# EAGLE board sensor (EAGLE 9.6.1)
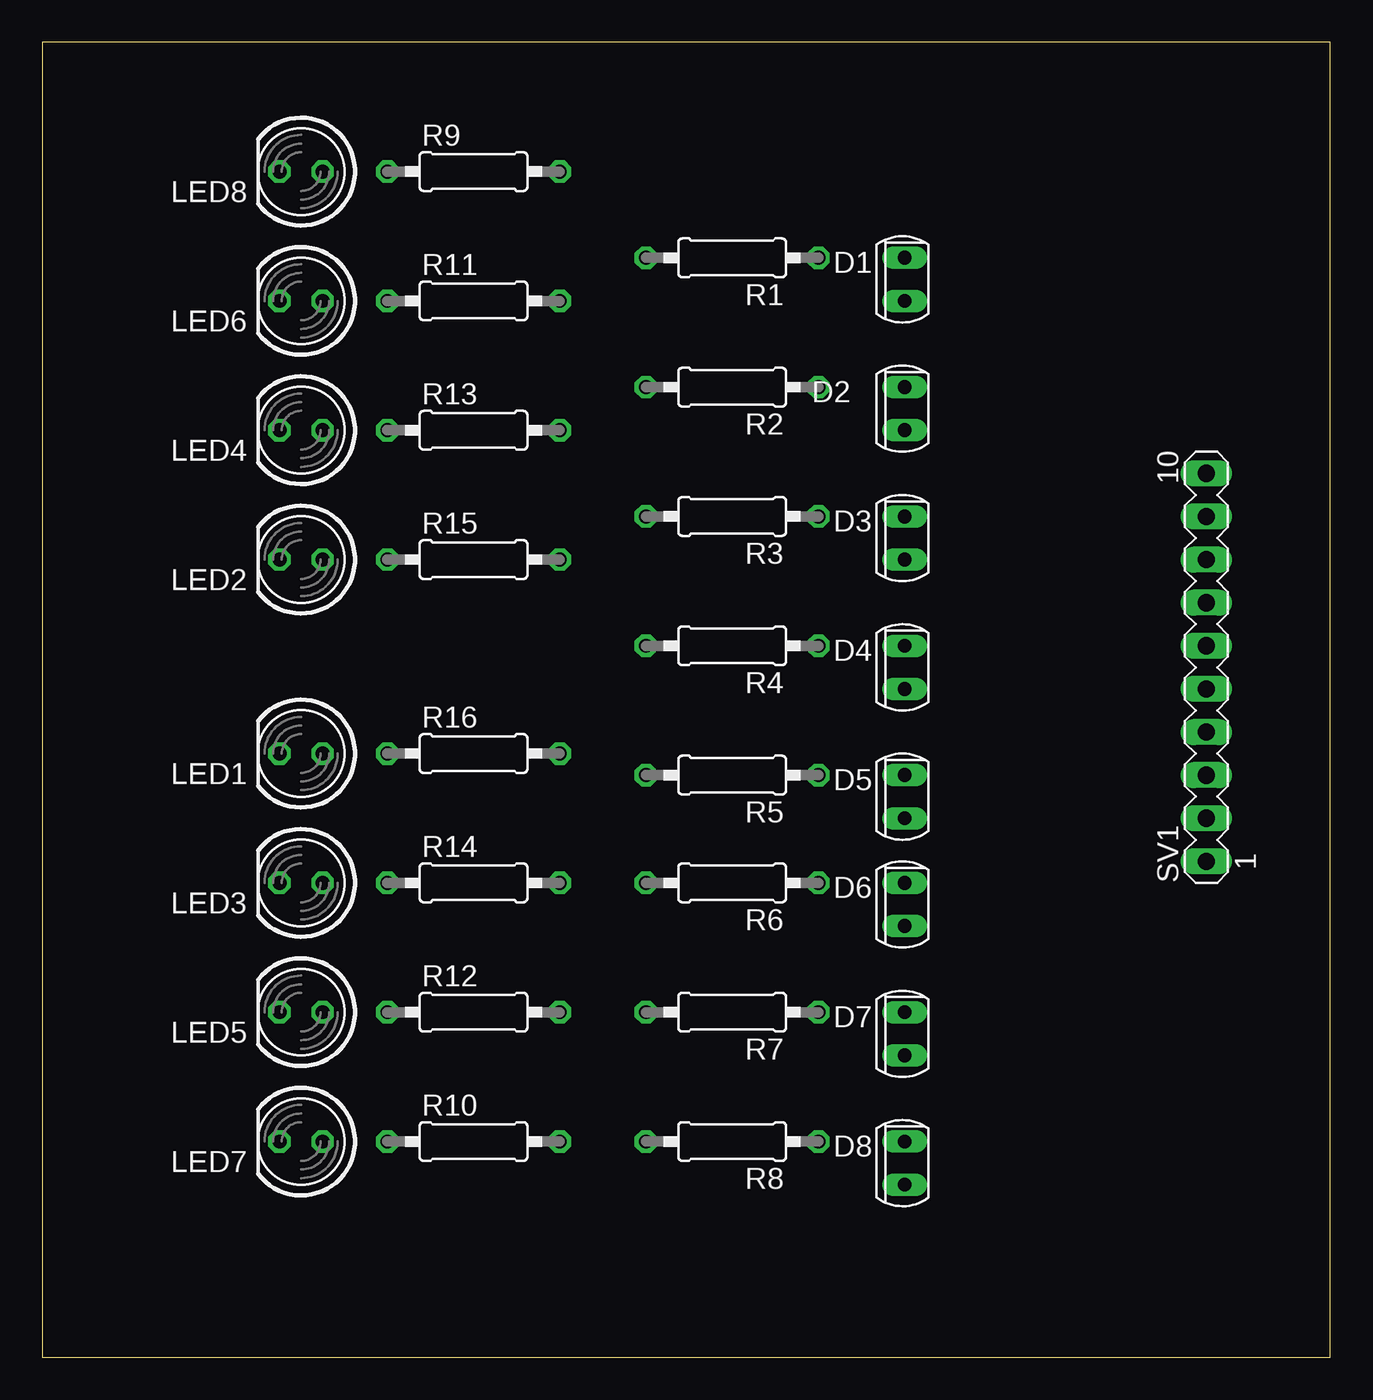
[diagram p0: board, top side]
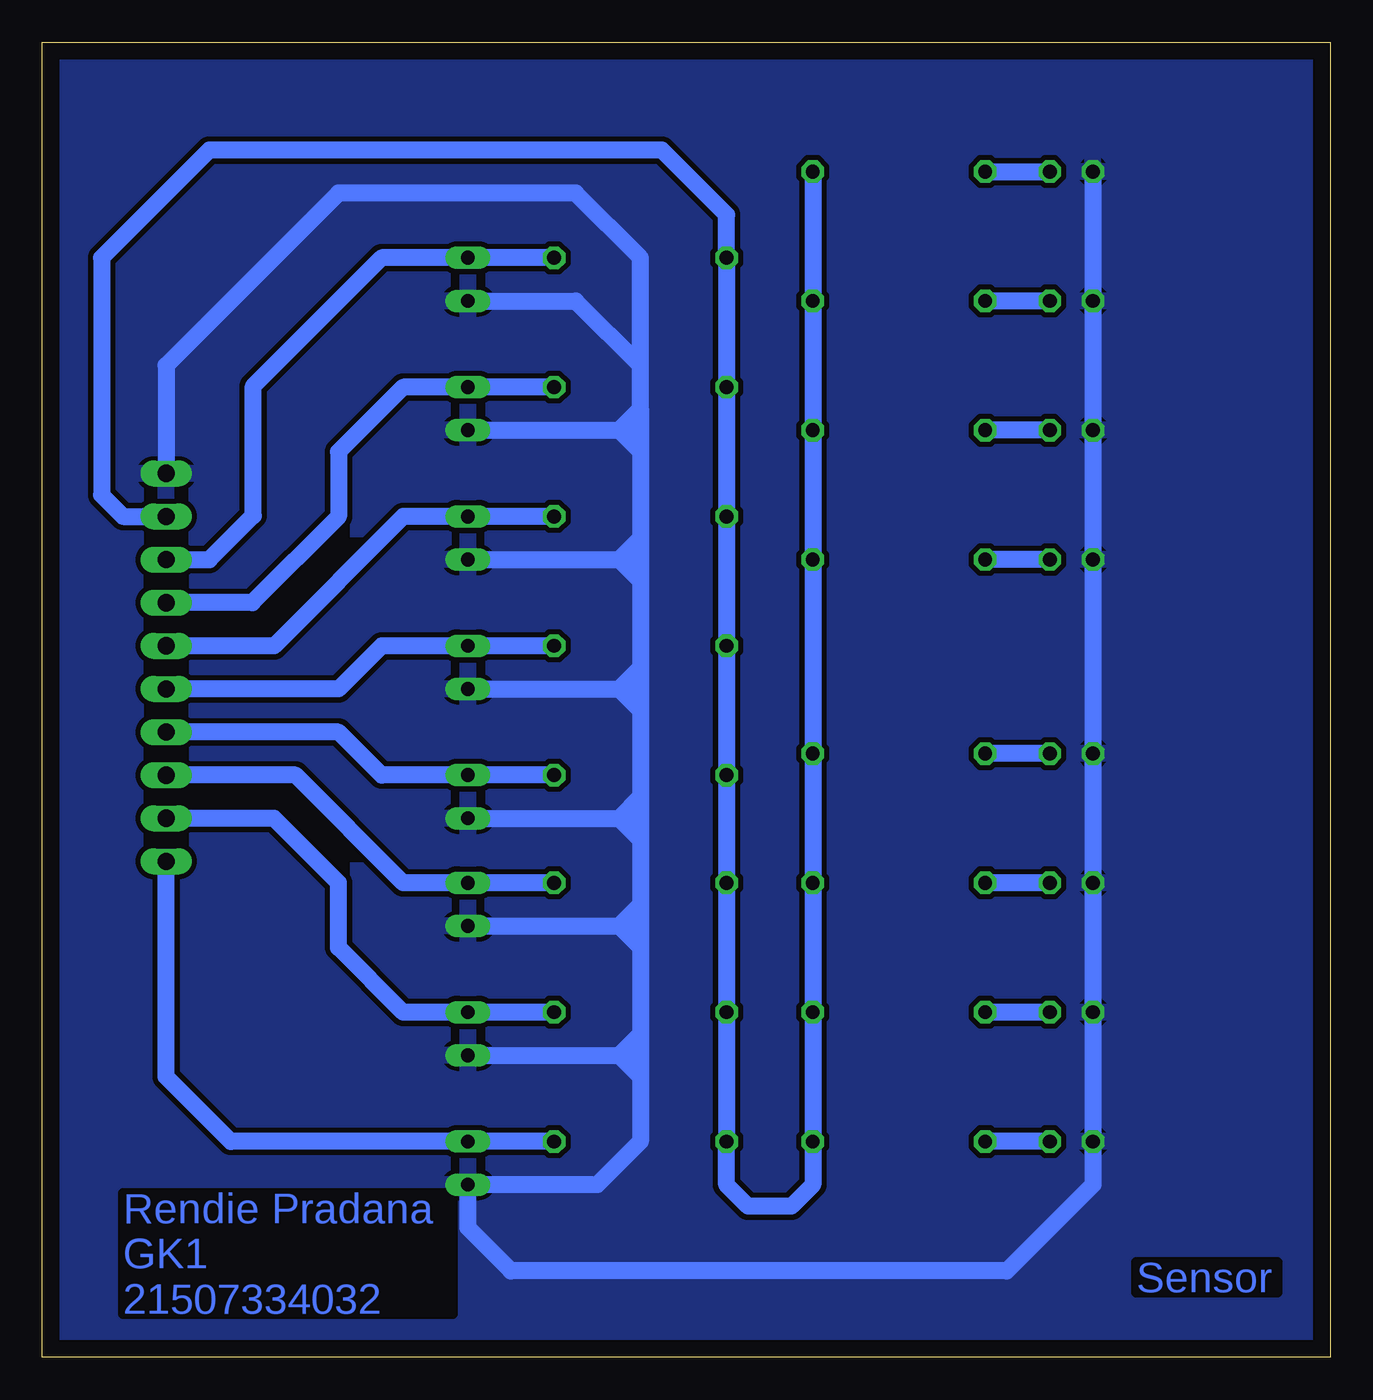
[diagram p1: board, bottom side, seen from below]

Size 75.87 x 77.46 mm. Coordinates in mm from the lower left corner, seen from the top.
Outline: 0,0 75.87,0 75.87,77.46 0,77.46 0,0
Copper layers (1*16): Top 0.035mm / dielectric 1.5mm / Bottom 0.035mm
Design rules "default *": minimum track width 6mil, minimum drill 0.35mm, track to track 12mil, track to pad 12mil, pad to pad 12mil, via to via 12mil, smd to smd 12mil, copper to edge 40mil, drill to drill 6mil, minimum pad ring 10mil, minimum via ring 8mil, stop-mask expansion 4mil, vias tented up to drill 0mil, thermal gap 10mil

## Footprints (pad centres in the part's own frame; a part is rotated, then mirrored left to right if it is on the bottom)
SFH225 = drill 0.813 long: A 0,1.27; K 0,-1.27
LED5MM = drill 0.813 octagon: A -1.27,0; K 1.27,0
0207/10 = drill 0.813 octagon: 1 -5.08,0; 2 5.08,0
MA10-1 = drill 1.016 long: 1 -11.43,0; 2 -8.89,0; 3 -6.35,0; 4 -3.81,0; 5 -1.27,0; 6 1.27,0; 7 3.81,0; 8 6.35,0; 9 8.89,0; 10 11.43,0

## Placement (x,y rotation side)
D1  PhotoDioda  [SFH225]  50.8,63.5 180 top
D2  PhotoDioda  [SFH225]  50.8,55.88 180 top
D3  PhotoDioda  [SFH225]  50.8,48.26 180 top
D4  PhotoDioda  [SFH225]  50.8,40.64 180 top
D5  PhotoDioda  [SFH225]  50.8,33.02 180 top
D6  PhotoDioda  [SFH225]  50.8,26.67 180 top
D7  PhotoDioda  [SFH225]  50.8,19.05 180 top
D8  PhotoDioda  [SFH225]  50.8,11.43 180 top
LED1  LED putih SB  [LED5MM]  15.24,35.56 180 top
LED2  LED putih SB  [LED5MM]  15.24,46.99 180 top
LED3  LED putih SB  [LED5MM]  15.24,27.94 180 top
LED4  LED putih SB  [LED5MM]  15.24,54.61 180 top
LED5  LED putih SB  [LED5MM]  15.24,20.32 180 top
LED6  LED putih SB  [LED5MM]  15.24,62.23 180 top
LED7  LED putih SB  [LED5MM]  15.24,12.7 180 top
LED8  LED putih SB  [LED5MM]  15.24,69.85 180 top
R1  [0207/10]  40.64,64.77 180 top
R2  [0207/10]  40.64,57.15 180 top
R3  [0207/10]  40.64,49.53 180 top
R4  [0207/10]  40.64,41.91 180 top
R5  [0207/10]  40.64,34.29 180 top
R6  [0207/10]  40.64,27.94 180 top
R7  [0207/10]  40.64,20.32 180 top
R8  [0207/10]  40.64,12.7 180 top
R9  330  [0207/10]  25.4,69.85 0 top
R10  330  [0207/10]  25.4,12.7 0 top
R11  330  [0207/10]  25.4,62.23 0 top
R12  330  [0207/10]  25.4,20.32 0 top
R13  330  [0207/10]  25.4,54.61 0 top
R14  330  [0207/10]  25.4,27.94 0 top
R15  330  [0207/10]  25.4,46.99 0 top
R16  330  [0207/10]  25.4,35.56 0 top
SV1  [MA10-1]  68.58,40.64 90 top

## Library data of the parts
D1-D8 = opto-trans-siemens
LED1-LED8 = led
R1-R16 = resistor
SV1 = con-lstb

## Nets
GND: D1.A D2.A D3.A D4.A D5.A D6.A D7.A D8.A LED1.K LED2.K LED3.K LED4.K LED5.K LED6.K LED7.K LED8.K SV1.10
N$1: LED7.A R10.1
N$2: D7.K R7.1 SV1.2
N$3: D8.K R8.1 SV1.1
N$4: D1.K R1.1 SV1.8
N$5: D2.K R2.1 SV1.7
N$6: D3.K R3.1 SV1.6
N$7: D5.K R5.1 SV1.4
N$8: D4.K R4.1 SV1.5
N$9: D6.K R6.1 SV1.3
N$10: LED6.A R11.1
N$11: LED5.A R12.1
N$12: LED4.A R13.1
N$13: LED3.A R14.1
N$14: LED2.A R15.1
N$15: LED1.A R16.1
N$16: LED8.A R9.1
VCC: R1.2 R2.2 R3.2 R4.2 R5.2 R6.2 R7.2 R8.2 R9.2 R10.2 R11.2 R12.2 R13.2 R14.2 R15.2 R16.2 SV1.9

## Tracks (layer width: path | path; a pad name or v marks a point on that pad's centre or on a via)
GND
  Bottom 1.016: D1.A 44.45,62.23 40.64,58.42 | 40.64,55.88 40.64,58.42 | 40.64,55.88 40.64,54.61 | 40.64,54.61 40.64,53.34 | 40.64,53.34 40.64,48.26 | 40.64,48.26 40.64,46.99 | 40.64,46.99 40.64,45.72 | 40.64,45.72 40.64,40.64 | 40.64,40.64 40.64,39.37 | 40.64,39.37 40.64,38.1 | 40.64,38.1 40.64,33.02 | 40.64,33.02 40.64,31.75 | 40.64,31.75 40.64,30.48 | 40.64,30.48 40.64,26.67 | 40.64,26.67 40.64,25.4 | 40.64,25.4 40.64,24.13 | 40.64,24.13 40.64,19.05 | 40.64,19.05 40.64,17.78 | 40.64,17.78 40.64,16.51 | 40.64,16.51 40.64,12.7 43.18,10.16 D8.A 50.8,7.62 48.26,5.08 19.05,5.08 13.97,10.16 LED7.K LED5.K LED3.K LED1.K LED2.K LED4.K LED6.K LED8.K | D7.A 41.91,17.78 | 40.64,17.78 41.91,17.78 | D6.A 41.91,25.4 | 41.91,25.4 40.64,25.4 | D4.A 41.91,39.37 | 40.64,39.37 41.91,39.37 | D3.A 41.91,46.99 | 40.64,46.99 41.91,46.99 | D2.A 41.91,54.61 | 40.64,54.61 41.91,54.61 | 41.91,17.78 40.64,19.05 | 41.91,17.78 40.64,16.51 | 41.91,25.4 40.64,24.13 | 41.91,25.4 40.64,26.67 | D5.A 41.91,31.75 | 40.64,31.75 41.91,31.75 | 41.91,31.75 40.64,30.48 | 41.91,31.75 40.64,33.02 | 41.91,39.37 40.64,38.1 | 41.91,39.37 40.64,40.64 | 41.91,46.99 40.64,45.72 | 41.91,46.99 40.64,48.26 | 41.91,54.61 40.64,53.34 | 41.91,54.61 40.64,55.88 | 40.64,58.42 40.64,64.77 44.45,68.58 58.42,68.58 68.58,58.42 SV1.10
  pour Bottom: 0,77.47 0,0 76.2,0 76.2,77.47
N$1
  Bottom 1.016: LED7.A R10.1
N$2
  Bottom 1.016: R7.1 D7.K 54.61,20.32 58.42,24.13 58.42,27.94 62.23,31.75 SV1.2
N$3
  Bottom 1.016: R8.1 D8.K 64.77,12.7 68.58,16.51 SV1.1
N$4
  Bottom 1.016: R1.1 D1.K 55.88,64.77 63.45,57.2 63.45,49.58 66.04,46.99 SV1.8
N$5
  Bottom 1.016: R2.1 D2.K 54.61,57.15 58.42,53.34 58.42,49.53 63.5,44.45 SV1.7
N$6
  Bottom 1.016: R3.1 D3.K 54.61,49.53 62.23,41.91 SV1.6
N$7
  Bottom 1.016: R5.1 D5.K 55.88,34.29 58.42,36.83 SV1.4
N$8
  Bottom 1.016: SV1.5 58.42,39.37 55.88,41.91 D4.K R4.1
N$9
  Bottom 1.016: R6.1 D6.K 54.61,27.94 60.96,34.29 SV1.3
N$10
  Bottom 1.016: LED6.A R11.1
N$11
  Bottom 1.016: LED5.A R12.1
N$12
  Bottom 1.016: LED4.A R13.1
N$13
  Bottom 1.016: LED3.A R14.1
N$14
  Bottom 1.016: LED2.A R15.1
N$15
  Bottom 1.016: LED1.A R16.1
N$16
  Bottom 1.016: R9.1 LED8.A
VCC
  Bottom 1.016: 69.85,49.53 SV1.9 71.12,49.53 72.39,50.8 72.39,64.77 66.04,71.12 39.37,71.12 35.56,67.31 R1.2 R2.2 R3.2 R4.2 R5.2 R6.2 R7.2 R8.2 35.56,10.16 34.29,8.89 31.75,8.89 30.48,10.16 R10.2 R12.2 R14.2 R16.2 R15.2 R13.2 R11.2 R9.2

## Text on the board
Bottom: Sensor | Rendie Pradana / GK1 / 21507334032